# Altium PCB OLED_0.91.PcbDoc
Units mm, origin at the board's own origin, x right, y up, seen from the top; angles counter-clockwise.
Board outline 12 x 31.73 mm, 2 copper layers (Top Layer, Bottom Layer); 16 components, 13 nets, 51 pads, 20 vias.
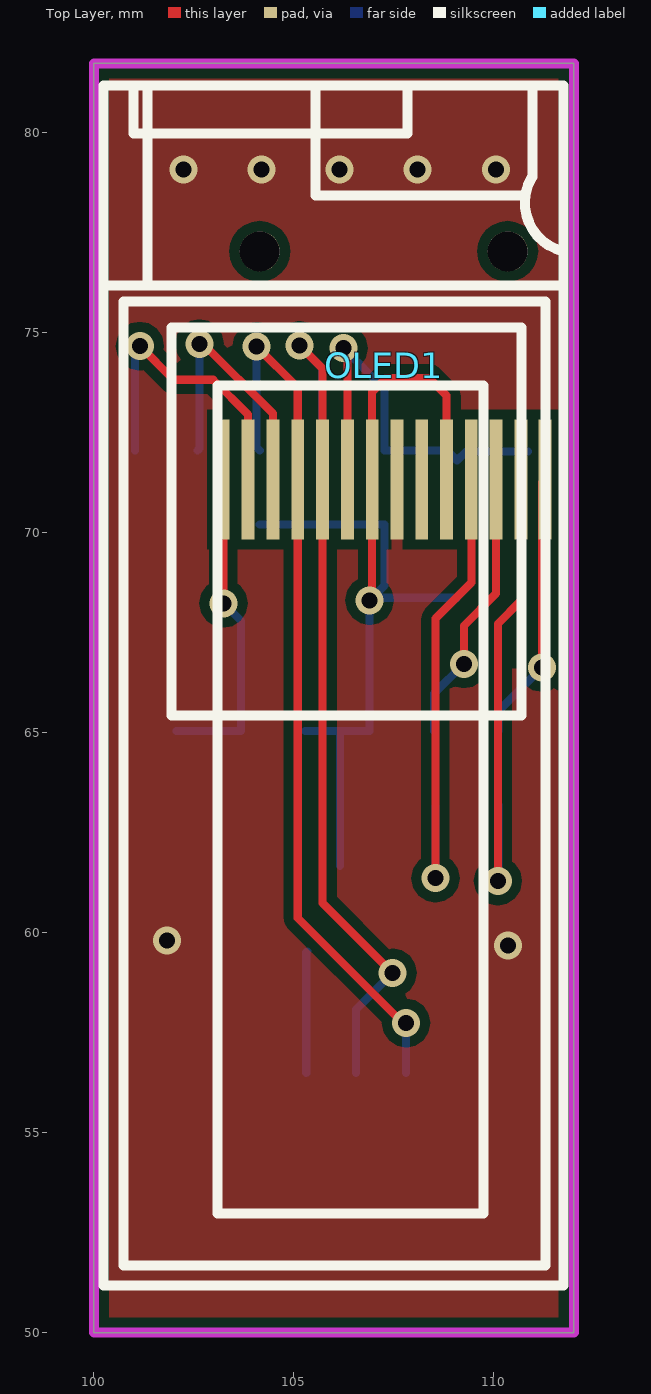
[diagram p0: Top Layer view]
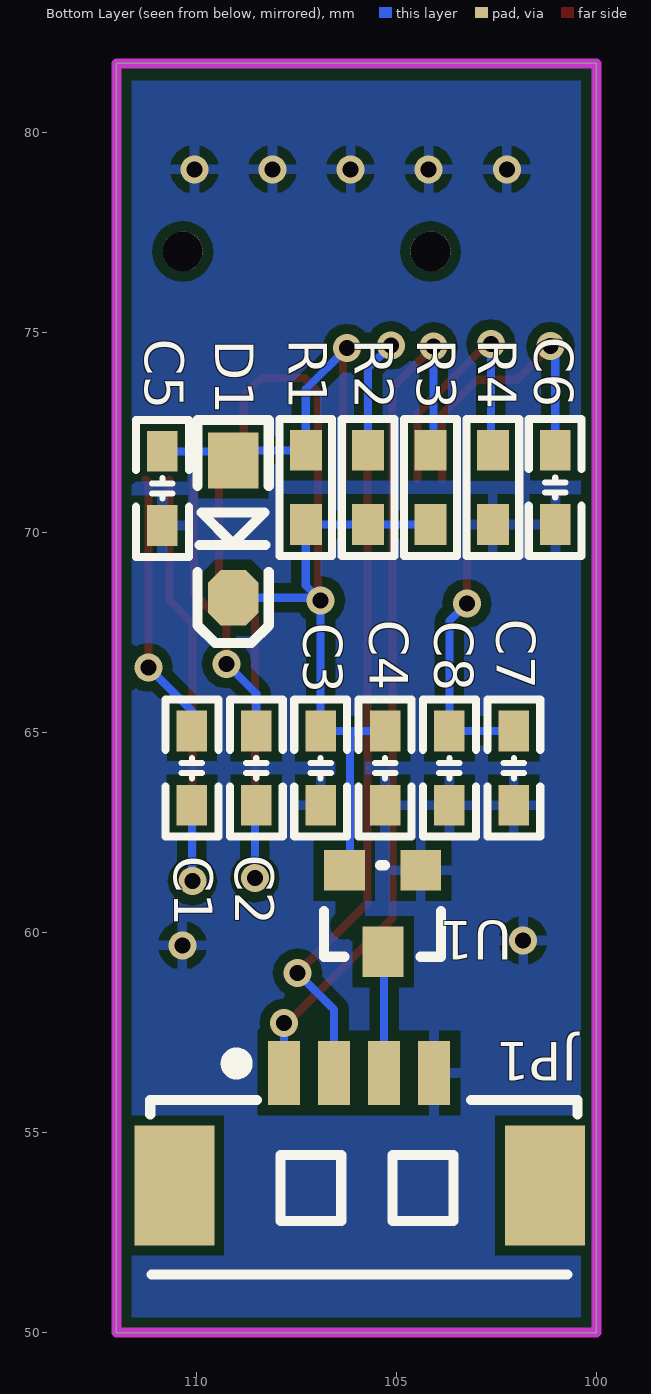
[diagram p1: Bottom Layer view, seen from below]
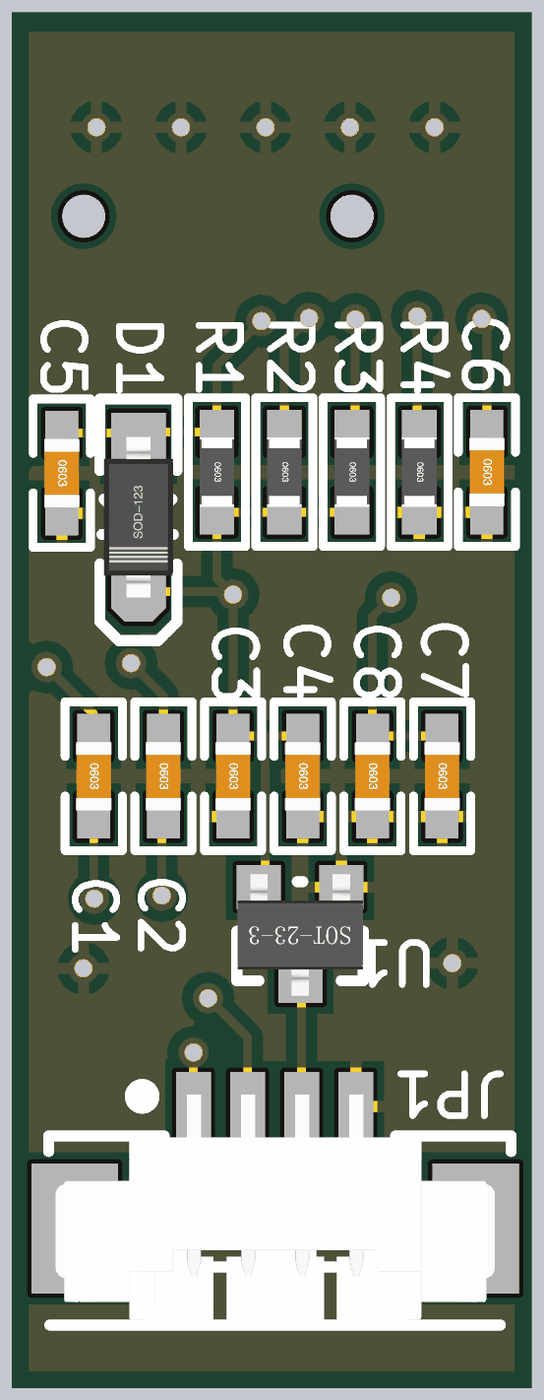
[diagram p2: 3D render of the assembled board from below, using the file's embedded part models]

## Layer stack, top to bottom
Top Layer: signal copper 0.0356
Dielectric: dielectric 0.32, FR-4, Dk 4.8
Bottom Layer: signal copper 0.0356

## Board outline
100,50 112,50 112,81.73 100,81.73

## Design rules (kind name [scope] priority, off if disabled: settings)
Clearance [All] p1: gap=0.254
PolygonConnect [All] p1: connectstyle=Relief reliefconductorwidth=0.254 reliefentries=4 polygonreliefangle="90 Angle"
RoutingVias [All] p1: holewidth=0.711 width=1.27 viastyle="Through Hole" minholewidth=0.3 minwidth=0.6 maxholewidth=0.711 maxwidth=1.27
SilkscreenOverComponentPads SilkToSolderMaskClearance [IsPad] p1: minsilkscreentomaskgap=0.254
SolderMaskExpansion [All] p1: expansion=0.102
Width [All] p1: maxlimit=2.54 minlimit=0.178 preferedwidth=0.254 minimp=50.000000 maximp=50.000000 favimp=50.000000
27 further rules are at their usual default settings.

## Components (designator, comment, footprint, x,y, rotation, side; value= is the part's Value field where it differs from the comment)
C1 "1uF" "C 0603_M" 110.113,64.112 r270 bottom
C2 "1uF" "C 0603_M" 108.503,64.112 r270 bottom
C3 "4.7uF" "C 0603_M" 106.894,64.112 r270 bottom
C4 "0.1uF" "C 0603_M" 105.284,64.112 r270 bottom
C5 "4.7uF" "C 0603_M" 110.85,71.103 r270 bottom
C6 "2.2uF" "C 0603_M" 101.03,71.127 r270 bottom
C7 "4.7uF" "C 0603_M" 102.065,64.112 r270 bottom
C8 "0.1uF" "C 0603_M" 103.675,64.112 r270 bottom
D1 "1N4007" SOD-123 109.08,70.086 r270 bottom
JP1 "HDR-1X4" "MX 1.25-WS-4P" 105.92,53.68 r180 bottom
OLED1 "OLED" "OLED 0.91_128*32_14pin_2" 107.257,74.179 r180 top
R1 "4k7" "R 0603_M" 107.267,71.127 r270 bottom
R2 "4k7" "R 0603_M" 105.707,71.127 r270 bottom
R3 "4k7" "R 0603_M" 104.148,71.127 r270 bottom
R4 "560k" "R 0603_M" 102.589,71.127 r270 bottom
U1 "662k" SOT-23 104.27,61.57 r0 bottom

## Footprints (in the part's own frame and the unit in brackets; to place one, negate y for a bottom-side part, rotate by r counter-clockwise, add the part's x,y. Pads: shape width x height; smd on the part's side, far side on the other; paste and mask are expansions set on the pad)
"C 0603_M" [mil] "无极性贴片电容"
  rect 40x30 smd: 1(-36.5,0) 2(36.5,0)
  silkscreen extent -68,-26 68,26, body extent -31,-16 31,16, height 32
"MX 1.25-WS-4P" [mm] "长：10.15mm，宽：4.2mm，高：3.4mm"
  rect 2x3 smd: 0(-4.632,0) 0(4.632,0)
  rect 0.8x1.6 smd: 1(-1.889,2.811) 2(-0.639,2.811) 3(0.611,2.811) 4(1.861,2.811)
  silkscreen extent -5.23,-2.23 5.45,3.25, body extent -5.07,-2.1 5.07,3.09, height 3.4
"OLED 0.91_128*32_14pin_2" [mm] "0.91寸OLED 14脚"
  rect 0.32x3 smd: 1(-4.02,2.85) 2(-3.42,2.85) 3(-2.8,2.85) 4(-2.181,2.85) 5(-1.561,2.85) 6(-0.941,2.85) 7(-0.321,2.85) 8(0.298,2.85) 9(0.918,2.85) 10(1.538,2.85) 11(2.16,2.85) 12(2.78,2.85) 13(3.4,2.85) 14(4.02,2.85)
  round 1 hole 1 unplated: ""(-3.087,-2.85) ""(3.11,-2.85)
  silkscreen extent -4.49,-7 7.01,23
"R 0603_M" [mil] "1/10W贴片电阻"
  rect 40x31.5 smd: 1(-36.5,0) 2(36.5,0)
  silkscreen extent -68,-26 68,26, body extent -31,-16 31,16, height 16
SOD-123 [mil] "2.7x1.6X1.1mm（长宽高，不包括引脚）"
  rect 55x50 smd: 1(-67.5,0)
  oct 55x50 smd: 2(67.5,0)
  silkscreen extent -108,-35 112,35, body extent -73,-31 73,31, height 48
SOT-23 [mil]
  rect 40x40 smd: 1(4.88,0.63) 2(79.88,0.63)
  rect 40x50 smd: 3(41.88,80.63)
  silkscreen extent -15,-4 100,86, body extent -15,-11 99,99, height 47

## Part data
C1 C2 C3 C4 C5 C6 C7 C8: library part C, "无极性贴片电容"
D1: "整流二极管"
JP1: library part "Header 4", "4P接插件"
OLED1: library part "OLED 0.91_128*32_14pin", "OLED 0.91寸 128*32 14脚"
R1 R2 R3 R4: library part R, "贴片电阻"
U1: "3.3V稳压芯片 XC662k输出300mA"

## Via types
v1: diameter 0.7, hole 0.4, Top Layer to Bottom Layer, tented both sides, 20 vias

## Nets (pads, with @x,y where several pads share a name; then routed paths per layer and width w, separated by ;. In a path a pad name is that pad's centre, name@x,y a point inside that pad or via, vN(x,y) a via of type N, cw(c..) or ccw(c..) an arc to the next point about the centre after c; other vN are vias at no path point)
GND: C3.2 C4.2 C5.2 C6.2 C7.2 C8.2 JP1.4 OLED1.7 R4.2 U1.1
  other v1: 110.35,59.68 101.83,59.8 102.24,79.08 104.192,79.08 106.145,79.08 108.097,79.08 110.05,79.08
NetC1_1: C1.1 OLED1.1 | length 6.8
  Top Layer w0.203: v1(111.2,66.63) 111.2,71.252 OLED1.1
  Bottom Layer w0.203: C1.1 110.113,65.543 v1(111.2,66.63)
NetC1_2: C1.2 OLED1.2 | length 12.2
  Top Layer w0.203: v1(110.1,61.29) 110.1,67.72 110.677,68.297 OLED1.2
  Bottom Layer w0.203: v1(110.1,61.29) 110.113,61.303 C1.2
NetC2_1: C2.1 OLED1.3 | length 6.9
  Top Layer w0.203: v1(109.25,66.72) 109.25,67.67 110.057,68.477 OLED1.3
  Bottom Layer w0.203: C2.1 108.503,65.973 v1(109.25,66.72)
NetC2_2: C2.2 OLED1.4 | length 12.1
  Top Layer w0.203: v1(108.54,61.36) 108.54,67.85 109.438,68.748 OLED1.4
  Bottom Layer w0.203: v1(108.54,61.36) C2.2@108.54,63.148
NetC6_1: C6.1 OLED1.13 | length 7.7
  Top Layer w0.203: v1(101.15,74.66) 101.99,73.82 102.984,73.82 103.857,72.947 OLED1.13
  Bottom Layer w0.203: C6.1 101.03,74.54 v1(101.15,74.66)
NetC7_1: C7.1 C8.1 OLED1.14 | length 8.1
  Top Layer w0.203: OLED1.14 103.237,68.233 v1(103.24,68.23)
  Bottom Layer w0.203: C7.1 C8.1 103.675,67.795 v1(103.24,68.23)
NetOLED1_12: OLED1.12 R4.1 | length 6.9
  Top Layer w0.203: v1(102.64,74.72) 102.731,74.72 104.477,72.974 OLED1.12
  Bottom Layer w0.203: R4.1 102.64,72.105 v1(102.64,74.72)
RES#: C5.1 D1.1 OLED1.9 R1.1 | length 10.1
  Top Layer w0.203: v1(106.24,74.61) 106.339,74.511 OLED1.9
  Bottom Layer w0.203: v1(106.24,74.61) 107.267,73.583 R1.1 108.826,72.054 D1.1 109.309,72.03 C5.1
SCL: JP1.2 OLED1.10 R2.1 | length 22.4
  Top Layer w0.203: v1(105.14,74.68) 105.719,74.101 OLED1.10 105.719,60.741 v1(107.47,58.99)
  Bottom Layer w0.203: v1(105.14,74.68) 105.707,74.113 R2.1 ; JP1.2@106.557,56.491 106.557,58.077 v1(107.47,58.99)
SDA: JP1.1 OLED1.11 R3.1 | length 22.4
  Top Layer w0.203: v1(104.07,74.65) 105.097,73.623 OLED1.11 105.097,60.365 107.722,57.74 v1(107.807,57.74)
  Bottom Layer w0.203: v1(104.07,74.65) 104.07,72.133 R3.1 ; JP1.1 v1(107.807,57.74)
VCC: C3.1 C4.1 D1.2 OLED1.5 OLED1.8 R1.2 R2.2 R3.2 U1.2 | length 25
  Top Layer w0.203: v1(106.894,68.304) 106.959,68.369 OLED1.8 106.959,73.519 107.3,73.86 108.38,73.86 108.818,73.422 OLED1.5
  Bottom Layer w0.203: R3.2 R2.2 R1.2 107.267,68.677 v1@106.961,68.371 ; C4.1 C3.1 v1(106.894,68.304) v1@106.961,68.371 ; U1.2@106.157,61.67 106.157,64.992 ; D1.2 v1@106.961,68.371
VCC_IN: JP1.3 U1.3 | length 4.6
  Bottom Layer w0.203: JP1.3@105.307,56.59 105.307,58.126 ; JP1.3 105.309,59.497 U1.3
pads on no net: JP1.0 OLED1. OLED1.6

## Polygon pours and split planes (outlines as drawn)
GND on Top Layer "Top Layer-No Net" (solid, remove dead copper, pour order 6): 113.66,81.34 98.7,81.34 98.7,49.17 98.7,49.42 113.45,49.42
GND on Bottom Layer "Top Layer-No Net" (solid, remove dead copper, pour order 8): 112.89,81.29 98.9,81.29 98.9,48.81 112.79,48.81

## Keep-outs
Keep-Out Layer:
  the board outline again, w0.254